# Altium PCB B502DA.PcbDoc
Units mm, origin at the board's own origin, x right, y up, seen from the top; angles counter-clockwise.
Board outline 30 x 15 mm, 4 copper layers (Top Layer, Power-1, Power-2, Bottom Layer), stack 1.619 mm thick; 9 components, 5 nets, 29 pads, 18 vias.
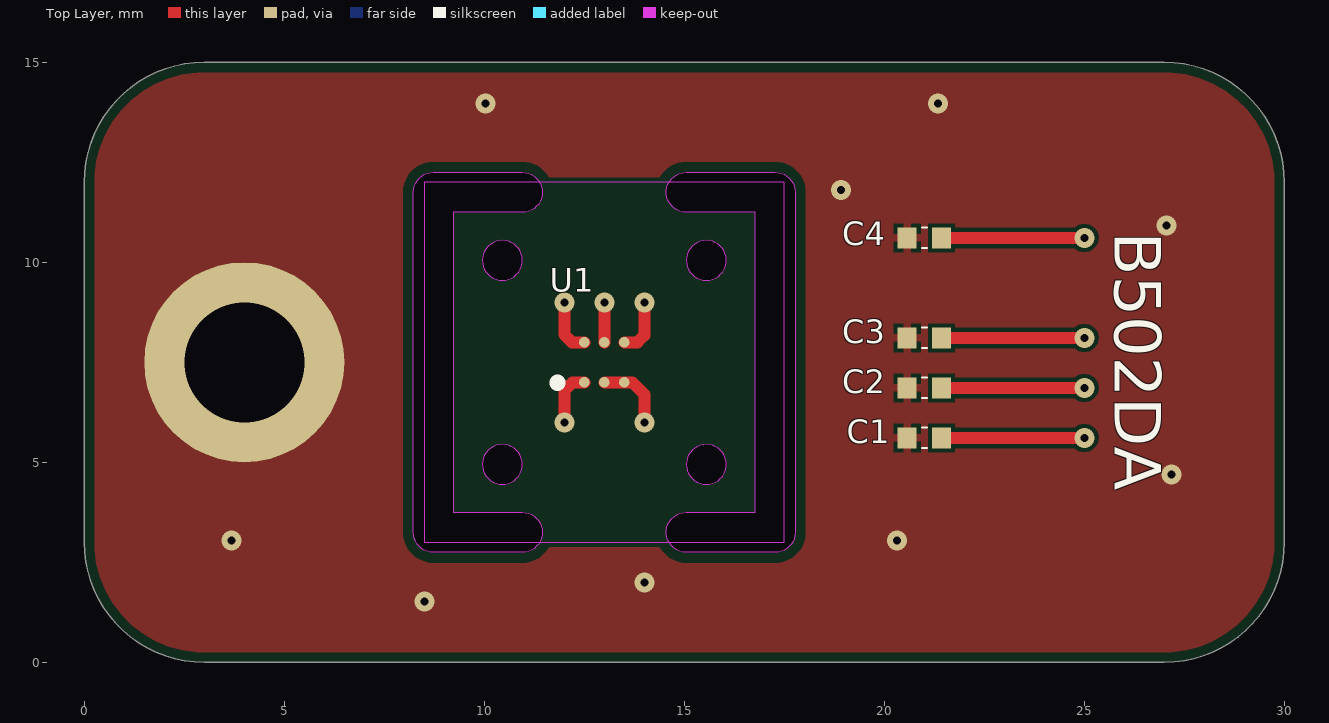
[diagram p0: Top Layer view]
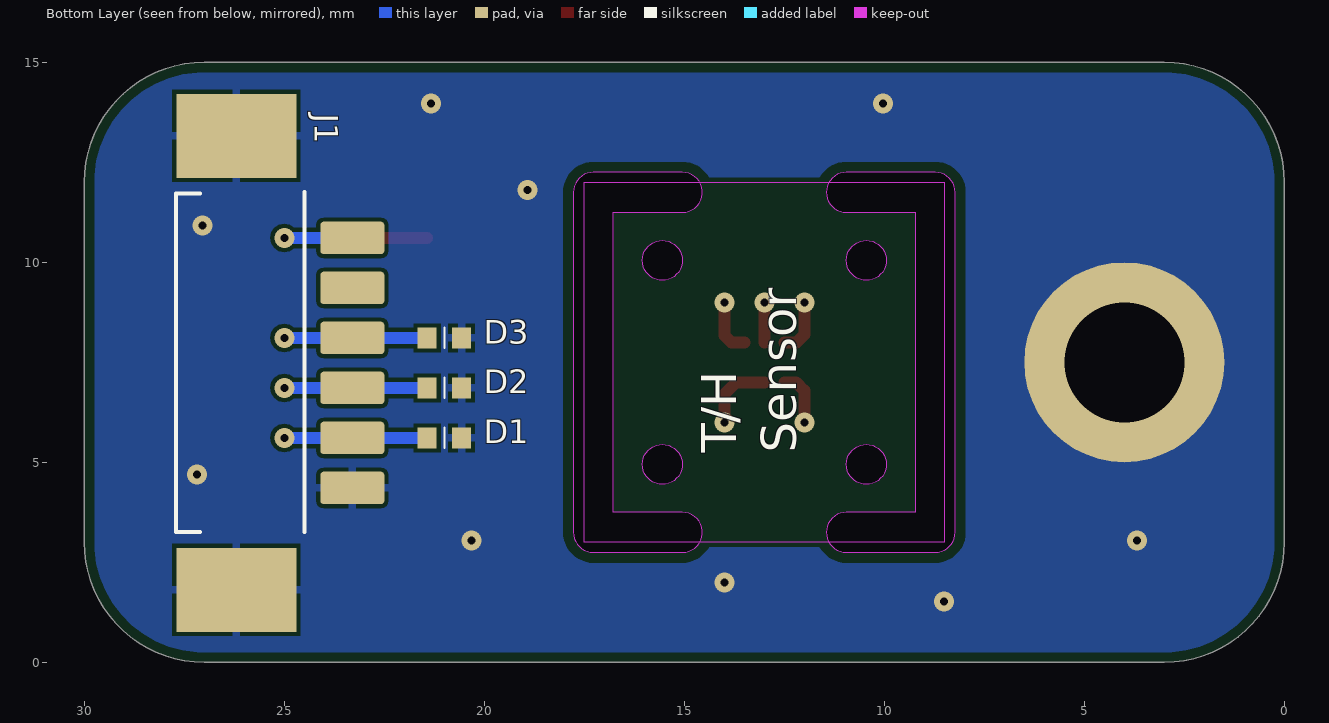
[diagram p1: Bottom Layer view, seen from below]
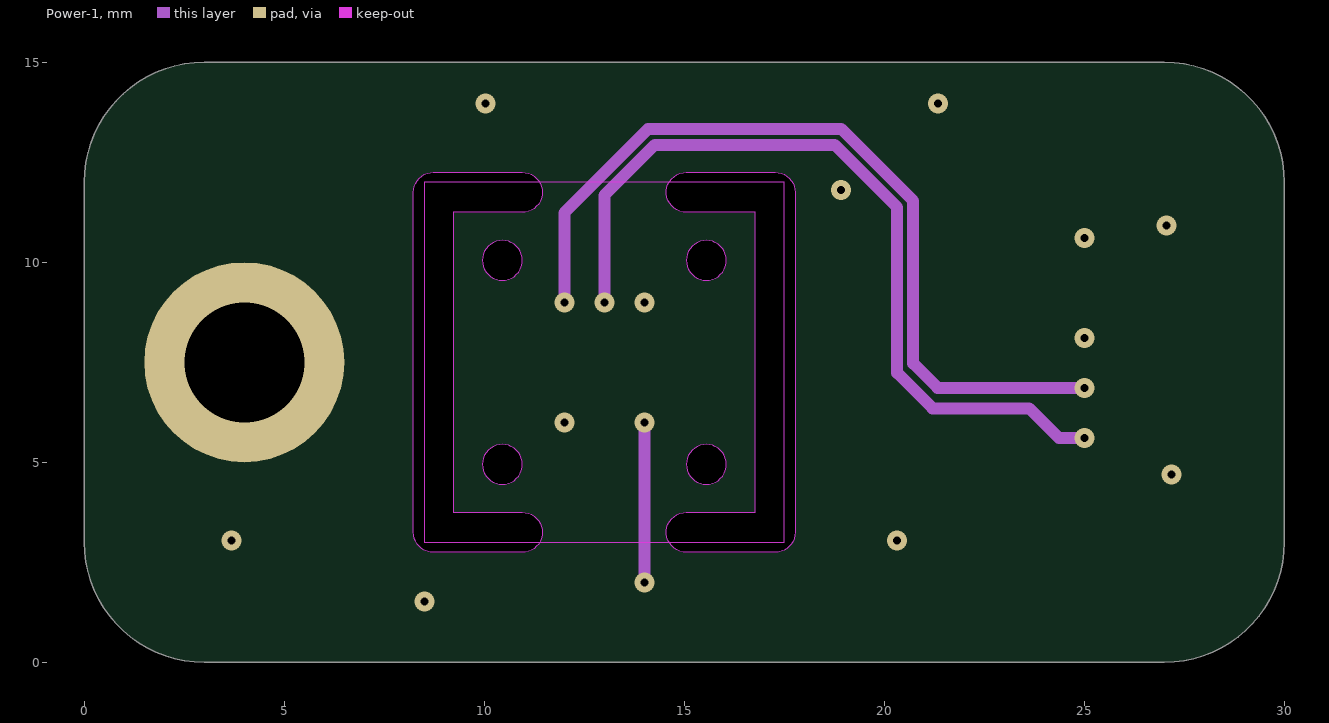
[diagram p2: Power-1]
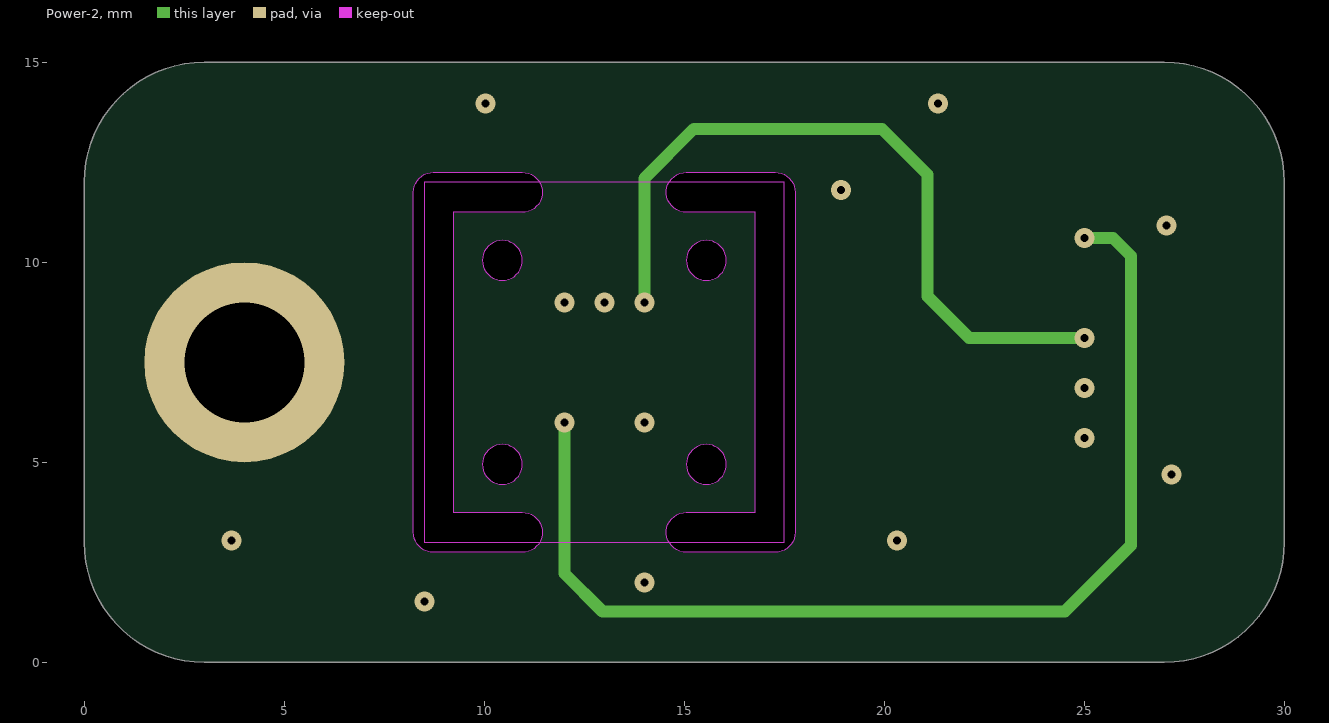
[diagram p3: Power-2]
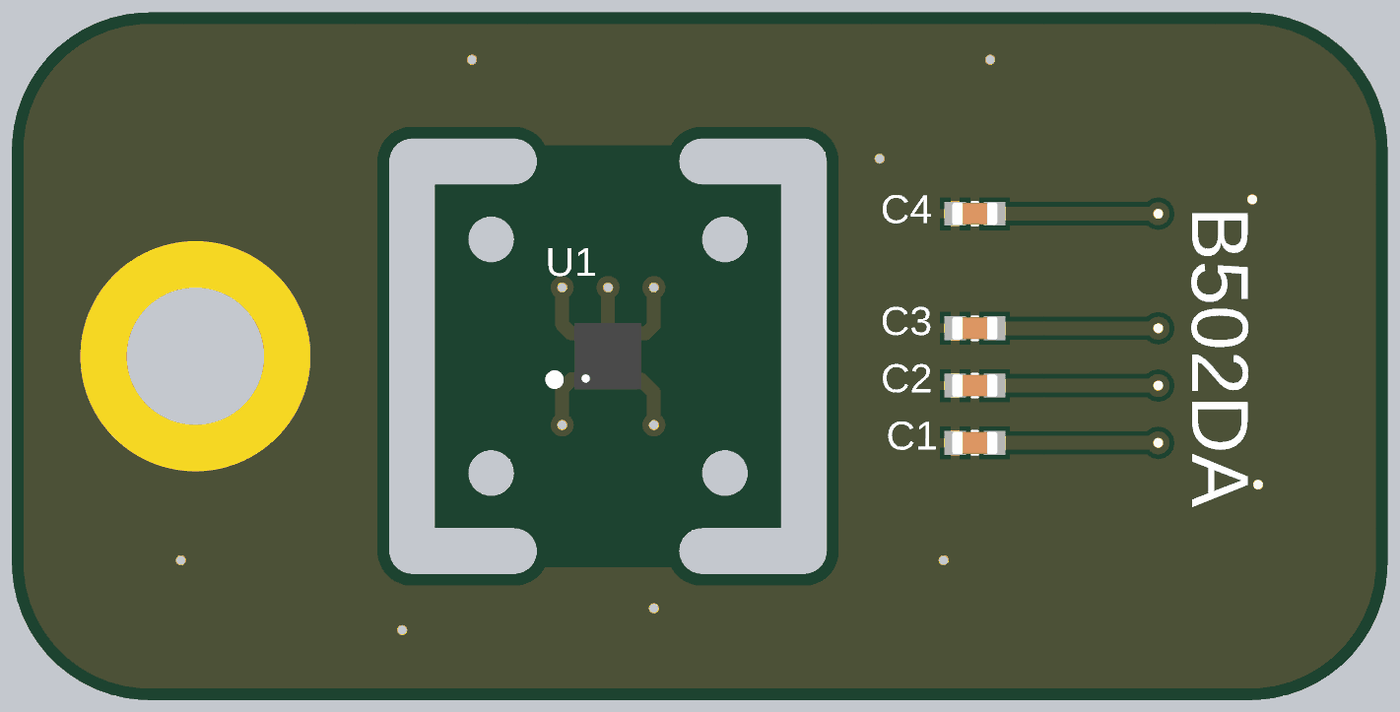
[diagram p4: 3D render of the assembled board from above, using the file's embedded part models]
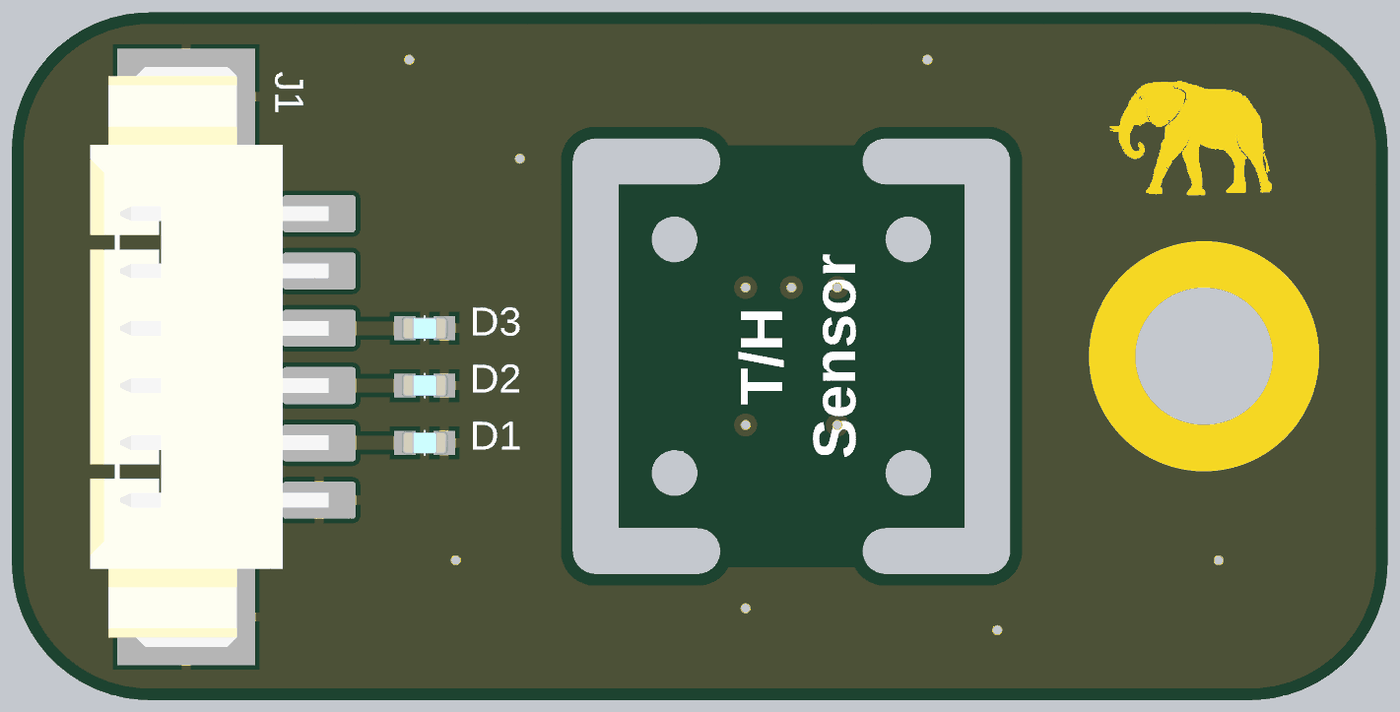
[diagram p5: 3D render of the assembled board from below, using the file's embedded part models]

## Layer stack, top to bottom
Top Solder: solder mask 0.0254, SM-001, Dk 4
Top Layer: signal copper 0.035
Dielectric 1: prepreg 0.2083, PP-022, Dk 4.5
Power-1: signal copper 0.071
Dielectric 3: core 0.9906, Core-042, Dk 4.6
Power-2: signal copper 0.071
Dielectric 5: prepreg 0.2083, PP-022, Dk 4.5
Bottom Layer: signal copper 0.035
Bottom Solder: solder mask 0.0254, SM-001, Dk 4

## Board outline
0,3 ccw(c3,3) 3,0 27,0 ccw(c27,3) 30,3 30,12 ccw(c27,12) 27,15 3,15 ccw(c3,12) 0,12
cut-out: 8.228,3.25 8.228,11.75 cw(c8.728,11.75) 8.728,12.25 10.95,12.25 cw(c10.95,11.75) 11.45,11.75 cw(c10.95,11.75) 10.95,11.25 9.228,11.25 9.228,3.75 10.95,3.75 cw(c10.95,3.25) 11.45,3.25 cw(c10.95,3.25) 10.95,2.75 8.728,2.75 cw(c8.728,3.25)
cut-out: 15.05,2.75 cw(c15.05,3.25) 15.05,3.75 16.772,3.75 16.772,11.25 15.05,11.25 cw(c15.05,11.75) 15.05,12.25 17.272,12.25 cw(c17.272,11.75) 17.772,11.75 17.772,3.25 cw(c17.272,3.25) 17.272,2.75
cut-out: 9.95,10.05 ccw(c10.45,10.05) 10.45,9.55 ccw(c10.45,10.05) 10.95,10.05 ccw(c10.45,10.05) 10.45,10.55 ccw(c10.45,10.05)
cut-out: 15.05,4.95 ccw(c15.55,4.95) 15.55,4.45 ccw(c15.55,4.95) 16.05,4.95 ccw(c15.55,4.95) 15.55,5.45 ccw(c15.55,4.95)
cut-out: 15.05,10.05 ccw(c15.55,10.05) 15.55,9.55 ccw(c15.55,10.05) 16.05,10.05 ccw(c15.55,10.05) 15.55,10.55 ccw(c15.55,10.05)
cut-out: 9.95,4.95 ccw(c10.45,4.95) 10.45,4.45 ccw(c10.45,4.95) 10.95,4.95 ccw(c10.45,4.95) 10.45,5.45 ccw(c10.45,4.95)

## Design rules (kind name [scope] priority, off if disabled: settings)
BoardOutlineClearance [All] p1: gap=0.25 ignorepadtopadclearanceinfootprint=FALSE except(0: Arc-SplitContinuation Track-SplitContinuation SMDPad-SplitContinuation THPad-SplitContinuation Via-SplitContinuation Fill-SplitContinuation Poly-SplitContinuation Region-SplitContinuation Text-SplitContinuation)
Clearance Clearance-xPP-xTP-xTT [All] p1: gap=0.1 ignorepadtopadclearanceinfootprint=FALSE except(0: Arc-Hole Track-Hole SMDPad-Hole THPad-Hole Via-Hole Fill-Hole Poly-Hole Region-Hole Text-Hole)
ComponentClearance [All] p1: gap=0.25 collisioncheckmode=3 verticalgap=0.25 showdistances=FALSE
DiffPairsRouting [All] p1: maxlimit=0.25 minlimit=0.25 mostfreqgap=0.25 toplayer_minwidth=0.381 toplayer_maxwidth=0.381 toplayer_prefwidth=0.381 midlayer1_minwidth=0.381 midlayer1_maxwidth=0.381 midlayer1_prefwidth=0.381 midlayer2_minwidth=0.381 midlayer2_maxwidth=0.381 midlayer2_prefwidth=0.381 bottomlayer_minwidth=0.381 bottomlayer_maxwidth=0.381 bottomlayer_prefwidth=0.381 maxuncoupledlength=12.5
Height [All] p1: minheight=0 maxheight=25 prefheight=12.5
HoleSize HoleSize-PTH [All] p1: absolutevalues=TRUE maxlimit=5 minlimit=0.15 maxpercent=80.000 minpercent=20.000
HoleToHoleClearance [All] p1: gap=0.35 allowstackedmicrovias=TRUE
MinimumAnnularRing "Minimum IAR  <= 0.45mm" [((ObjectKind = 'Pad') OR (ObjectKind = 'Via')) And (Layer = 'MultiLayer') And (HoleDiameter <= AsMM(0.45))] p1: minimumring=0.125 // minimum inner annular ring for pads <= 0.45mm finished hole size
MinimumAnnularRing "Minimum IAR  > 0.45mm" [((ObjectKind = 'Pad') OR (ObjectKind = 'Via')) And (Layer = 'MultiLayer') And (HoleDiameter > AsMM(0.45))] p2: minimumring=0.125 // minimum inner annular ring for pads > 0.45mm finished hole size
MinimumAnnularRing Minimum-IAR [All] p3: minimumring=0.125
MinimumSolderMaskSliver [All] p1: minsoldermaskwidth=0.08
PlaneClearance [InNet('ANT_GSM')] p1: clearance=0.05
PlaneClearance PlaneClearance-IPI [All] p2: clearance=0.25
PlaneConnect [All] p1: planeconnectstyle=Relief reliefexpansion=0.175 reliefentries=4 reliefconductorwidth=0.2 reliefairgap=0.1
PolygonConnect PolygonConnect_Via [All vs (ObjectKind = 'Via') And (HoleDiameter <= AsMM(0.45))] p1: connectstyle=Direct reliefconductorwidth=0.254 reliefentries=4 polygonreliefangle="90 Angle" airgapwidth=0.254
PolygonConnect PolygonConnect-xTW [All] p2: connectstyle=Relief reliefconductorwidth=0.2 reliefentries=4 polygonreliefangle="90 Angle" airgapwidth=0.1
RoutingCorners [All] p1: cornerstyle=45-Degree minsetback=2.5 maxsetback=2.5
RoutingVias "RoutingVias <= 0.45mm" [(ObjectKind = 'Via') And (HoleDiameter <= AsMM(0.45))] p1: holewidth=0.2 width=0.55 viastyle="Through Hole" minholewidth=0.15 minwidth=0.5 maxholewidth=0.45 maxwidth=0.8
RoutingVias "RoutingVias > 0.45mm" [(ObjectKind = 'Via') And (HoleDiameter > AsMM(0.45))] p2: holewidth=0.5 width=0.85 viastyle="Through Hole" minholewidth=0.5 minwidth=0.85 maxholewidth=0.9 maxwidth=1.25
SilkToSilkClearance [All] p1: silktosilkclearance=0.2
SilkToSolderMaskClearance SilkscreenOverComponentPads [IsPad] p1: minsilkscreentomaskgap=0.1 clearancetoexposedcopper=TRUE
SolderMaskExpansion SolderMaskExpansion_Via [(ObjectKind = 'Via') And (HoleDiameter <= AsMM(0.45))] p1: expansion=0.01 istentingtop=TRUE soldermaskfromhole=TRUE
SolderMaskExpansion [All] p2: expansion=0.01 istentingtop=FALSE
UnRoutedNet [All] p1: checkbadconnections=TRUE
Width Width-xTW [All] p1: maxlimit=1.5 minlimit=0.1 preferedwidth=0.2
18 further rules are at their usual default settings.

## Components (designator, comment, footprint, x,y, rotation, side; value= is the part's Value field where it differs from the comment)
C1 "Multilayer Ceramic Capacitor" CAPACITOR_0402 21,5.61 r0 top value=33pF
C2 "Multilayer Ceramic Capacitor" CAPACITOR_0402 21,6.86 r0 top value=33pF
C3 "Multilayer Ceramic Capacitor" CAPACITOR_0402 21,8.11 r0 top value=33pF
C4 "Multilayer Ceramic Capacitor" CAPACITOR_0402 21,10.61 r180 top value=100nF
D1 "ESD Suppressors" ESD_0402 21,5.61 r0 bottom locked
D2 "ESD Suppressors" ESD_0402 21,6.86 r0 bottom locked
D3 "ESD Suppressors" ESD_0402 21,8.11 r0 bottom locked
J1 "T/H Sensor Socket" "Connector_Tunic 6P" 26,7.5 r270 bottom locked
U1 "Humidity and temperature digital sensor" HDC2010 13,7.5 r90 top

## Footprints (in the part's own frame and the unit in brackets; to place one, negate y for a bottom-side part, rotate by r counter-clockwise, add the part's x,y. Pads: shape width x height; smd on the part's side, far side on the other; paste and mask are expansions set on the pad)
CAPACITOR_0402 [mm] "Chip Capacitor, IPC High Density"
  rect 0.47x0.52 smd: 1(-0.43,0) 2(0.43,0)
  silkscreen extent -0.06,-0.25 0.06,0.25, body extent -0.5,-0.25 0.5,0.25, height 0.49
"Connector_Tunic 6P" [mm] "6P Tunic Connector"
  rrect20% 0.81x1.6 smd mask+0.01: 1(-3.11,2.7) 2(-1.86,2.7) 3(-0.61,2.7) 4(0.64,2.7) 5(1.89,2.7) 6(3.14,2.7)
  rect 2.1x3 smd mask+0.01: 7(-5.66,-0.2) 8(5.69,-0.2)
  silkscreen extent -4.26,-1.7 4.24,1.5, body extent -6.31,-2.29 6.34,2.91, height 3.5
ESD_0402 [mm] "ESD, IPC High Density"
  rect 0.47x0.52 smd: 1(-0.43,0) 2(0.43,0)
  silkscreen extent 0,-0.25 0,0.25, body extent -0.5,-0.25 0.5,0.25, height 0.44
HDC2010 [mm]
  round 0.263 smd: A1(-0.5,0.5) A2(0.5,0.5) B1(-0.5,0) B2(0.5,0) C1(-0.5,-0.5) C2(0.5,-0.5)
  silkscreen extent -0.51,1.17 -0.51,1.17, body extent -0.73,-0.73 0.73,0.73, height 0.63

## Part data
C1 C2 C3: library part "Capacitor - 33pF [0402-6V3]", "Capacitor - 33pF [0402] (Ceramic)", Case=0402, Dielectric=X7R, Manufacturer_Name=Kemet, Manufacturer_Part_Number=C0402C330J9RACAUTO, Maximum Operating Temperature=+125, Minimum Operating Temperature=-55, Supplier Part Number 1=80-C0402C330J9RAUTO, Tolerance=10%, Voltage=6V3, ComponentLink1Description=DataSheet, ComponentLink1URL=https://api.kemet.com/component-edge/download/datasheet/C0402C330J9RACAUTO.pdf, ComponentLink2Description=Mouser, ComponentLink2URL=https://www.mouser.com/Search/Refine.aspx?Keyword=80-C0402C330J9RAUTO, Height=0.5mm, Mouser_Part_Number=80-C0402C330J9RAUTO, ROHS=Yes, Supplier 1=Mouser
C4: library part "Capacitor - 100nF [0402-6V3]", "Capacitor - 100nF [0402-6V3] (Ceramic)", Case=0402, Dielectric=X5R, Manufacturer_Name=AVX, Manufacturer_Part_Number=04026D104KAT4A, Maximum Operating Temperature=+85, Minimum Operating Temperature=-55, Tolerance=%10, Voltage=6V3, ComponentLink1Description=Mouser, ComponentLink1URL=https://www.mouser.com.tr/ProductDetail/AVX/04026D104KAT4A?qs=sGAEpiMZZMs0AnBnWHyRQPg4iYkCw7IMED%2F4kpqgf7w%3D, ComponentLink2Description=DataSheet, ComponentLink2URL=https://www.mouser.com.tr/datasheet/2/40/cx5r-776519.pdf, Height=0.25mm, Mouser_Part_Number=581-04026D104KAT4A, ROHS=Yes, Supplier 1=Avnet, Supplier Part Number 1=04026D104KAT4A
D1 D2 D3: library part "Diode - ESD Protection", "TVS Diode (Bi-directional)", Case=0402, Clamping Voltage=35V, Diode Capacitance=0.05pF, Manufacturer_Name="Bussmann / Eaton", Manufacturer_Part_Number=0402ESDA-MLP1, Maximum Operating Temperature=+125, Minimum Operating Temperature=-55, Supplier Part Number 1=504-0402ESDA-MLP1, Voltage ESD Air Gap=15kV, Voltage ESD Contact=8kV, Working Voltage=30V, ComponentLink1Description=DataSheet, ComponentLink1URL=https://www.mouser.com.tr/datasheet/2/87/47c59e11-d058-4882-bc35-d8572f2ca054-38826.pdf, ComponentLink2Description=Mouser, ComponentLink2URL=https://www.mouser.com.tr/ProductDetail/Bussmann-Eaton/0402ESDA-MLP1?qs=%2Fha2pyFadughxyc7TyLWeW%2FUvipVY6Ex3naV%2FjpO3plZBZWDLqV4bw%3D%3D, Height=0.436mm, Mouser_Part_Number=504-0402ESDA-MLP1, Polarity=Bidirectional, ROHS=Yes, Supplier 1=Mouser, Supplier 2=Digi-Key, Supplier Part Number 2=283-2964-1-ND
J1: library part "Connector - Mini Tunic 6P (1.25)", "Mini Tunic Connector with 6P", Manufacturer_Name=Molex, Manufacturer_Part_Number=53261-0671, Supplier Part Number 1=0532610671, ROHS=Yes, Supplier 1=Avnet, Supplier 2=Mouser, Supplier 3=Arrow, Supplier 4=Farnell, Supplier 5=Newark, Supplier 6=Digi-Key, Supplier Part Number 2=538-53261-0671, Supplier Part Number 3=53261-0671, Supplier Part Number 4=1125375, Supplier Part Number 5=93K4246, Supplier Part Number 6=WM7624CT-ND, System=Connector
U1: library part "IC - HDC2010YPAR", Case=DSBGA-6, Manufacturer_Name="Texas Instruments", Manufacturer_Part_Number=HDC2010YPAR, ComponentLink1Description=DataSheet, ComponentLink1URL=https://www.ti.com/lit/ds/symlink/hdc2010.pdf?ts=1594167980948&ref_url=https%253A%252F%252Fwww.google.com%252F, ComponentLink2Description=Mouser, ComponentLink2URL=https://www.mouser.com.tr/ProductDetail/Texas-Instruments/HDC2010YPAR?qs=EU6FO9ffTwc2CasHMLP4bA%3D%3D, Mouser_Part_Number=595-HDC2010YPAR, ROHS=Yes, Supplier 1=Arrow, Supplier 2=Avnet, Supplier 3=Mouser, Supplier 4=Digi-Key, Supplier 5=Digi-Key, Supplier 6=Digi-Key, Supplier Part Number 1=HDC2010YPAR, Supplier Part Number 2=HDC2010YPAR, Supplier Part Number 3=595-HDC2010YPAR, Supplier Part Number 4=296-47774-1-ND, Supplier Part Number 5=296-47774-6-ND, Supplier Part Number 6=296-47774-2-ND

## Free pads (board coordinates)
  round 5 hole 3: 2(4,7.5)

## Via types
v1: diameter 0.5, hole 0.2, Top Layer to Bottom Layer, tented both sides, 18 vias

## Nets (pads, with @x,y where several pads share a name; then routed paths per layer and width w, separated by ;. In a path a pad name is that pad's centre, name@x,y a point inside that pad or via, vN(x,y) a via of type N, cw(c..) or ccw(c..) an arc to the next point about the centre after c; other vN are vias at no path point)
3V3_Sensor: C4.1 J1.1 U1.A1 | length 34.3
  Top Layer w0.3: v1(12,6) 12,6.793 12.207,7 U1.A1 ; C4.1 v1(25,10.61)
  Power-2 w0.3: v1(12,6) 12,2.224 12.954,1.27 24.511,1.27 26.162,2.921 26.162,10.16 25.712,10.61 v1(25,10.61)
  Bottom Layer w0.3: J1.1 v1(25,10.61)
GND: C1.1 C2.1 C3.1 C4.2 D1.1 D2.1 D3.1 J1.6 J1.7 J1.8 pad.2 U1.B1 U1.C1 | length 5.8
  Top Layer w0.3: U1.B1 U1.C1 13.701,7 14,6.701 v1(14,6)
  Power-1 w0.3: v1(14,2) v1(14,6)
  other v1: 8.509,1.524 3.683,3.048 20.32,3.048 27.178,4.699 27.051,10.922 18.923,11.811 10.033,13.97 21.336,13.97
INTERRUPT: C3.2 D3.2 J1.3 U1.C2 | length 27.1
  Top Layer w0.3: U1.C2 13.824,8 14,8.176 v1(14,9) ; C3.2 v1(25,8.11)
  Power-2 w0.3: v1(14,9) 14,12.095 15.24,13.335 19.939,13.335 21.082,12.192 21.082,9.144 22.116,8.11 v1(25,8.11)
  Bottom Layer w0.3: D3.2 J1.3 v1(25,8.11)
SCL: C1.2 D1.2 J1.5 U1.B2 | length 28.8
  Top Layer w0.3: U1.B2 v1(13,9) ; C1.2 v1(25,5.61)
  Power-1 w0.3: v1(13,9) 13,11.672 14.263,12.935 18.757,12.935 20.32,11.372 20.32,7.239 21.209,6.35 23.622,6.35 24.362,5.61 v1(25,5.61)
  Bottom Layer w0.3: D1.2 J1.5 v1(25,5.61)
SDA: C2.2 D2.2 J1.4 U1.A2 | length 29.7
  Top Layer w0.3: v1(12,9) 12,8.193 12.193,8 U1.A2 ; C2.2 v1(25,6.86)
  Power-1 w0.3: v1(12,9) 12,11.238 14.097,13.335 18.923,13.335 20.72,11.538 20.72,7.474 21.334,6.86 v1(25,6.86)
  Bottom Layer w0.3: D2.2 J1.4 v1(25,6.86)
pads on no net: J1.2

## Polygon pours and split planes (outlines as drawn)
GND on Bottom Layer "Top Layer-No Net" (solid, pour order 1): 0,3 ccw(c3,3) 3,0 27,0 ccw(c27,3) 30,3 30,12 ccw(c27,12) 27,15 3,15 ccw(c3,12) 0,12
GND on Top Layer "Mechanical 13-No Net" (solid, pour order 0): 0,3 ccw(c3,3) 3,0 27,0 ccw(c27,3) 30,3 30,12 ccw(c27,12) 27,15 3,15 ccw(c3,12) 0,12

## Keep-outs
Keep-Out Layer:
  rectangle: 8.5,3 17.5,12

## Silkscreen, mask and mechanical layers (free items; w line width, h text height)
Top Overlay:
  text "B502DA" at 25.368,10.766 h2 r270
Bottom Overlay:
  text "T/H / Sensor" at 11.91,5.241 h1.5 r270
Bottom Solder:
  region: 1402 vertices and 36 holes, not listed, extent 2.517,11.009 6.068,13.512
Mechanical 1:
  circle w0.1: c15.55,10.05 r0.5
  circle w0.1: c10.45,10.05 r0.5
  circle w0.1: c10.45,4.95 r0.5
  circle w0.1: c15.55,4.95 r0.5
  lines w0.1: 0,3 ccw(c3,3) 3,0 27,0 ccw(c27,3) 30,3 30,12 ccw(c27,12) 27,15 3,15 ccw(c3,12) 0,12 0,3